# Altium PCB LAN7800-Board.PcbDoc (part 2 of 2)
Units mm, origin at the board's own origin, x right, y up, seen from the top; angles counter-clockwise.
Board outline 69 x 30 mm, 4 copper layers (Top Layer, Layer 1, Layer 2, Bottom Layer), stack 1.587 mm thick; 68 components, 49 nets, 280 pads, 123 vias.
Unrouted connection lines stored in the file: 60.
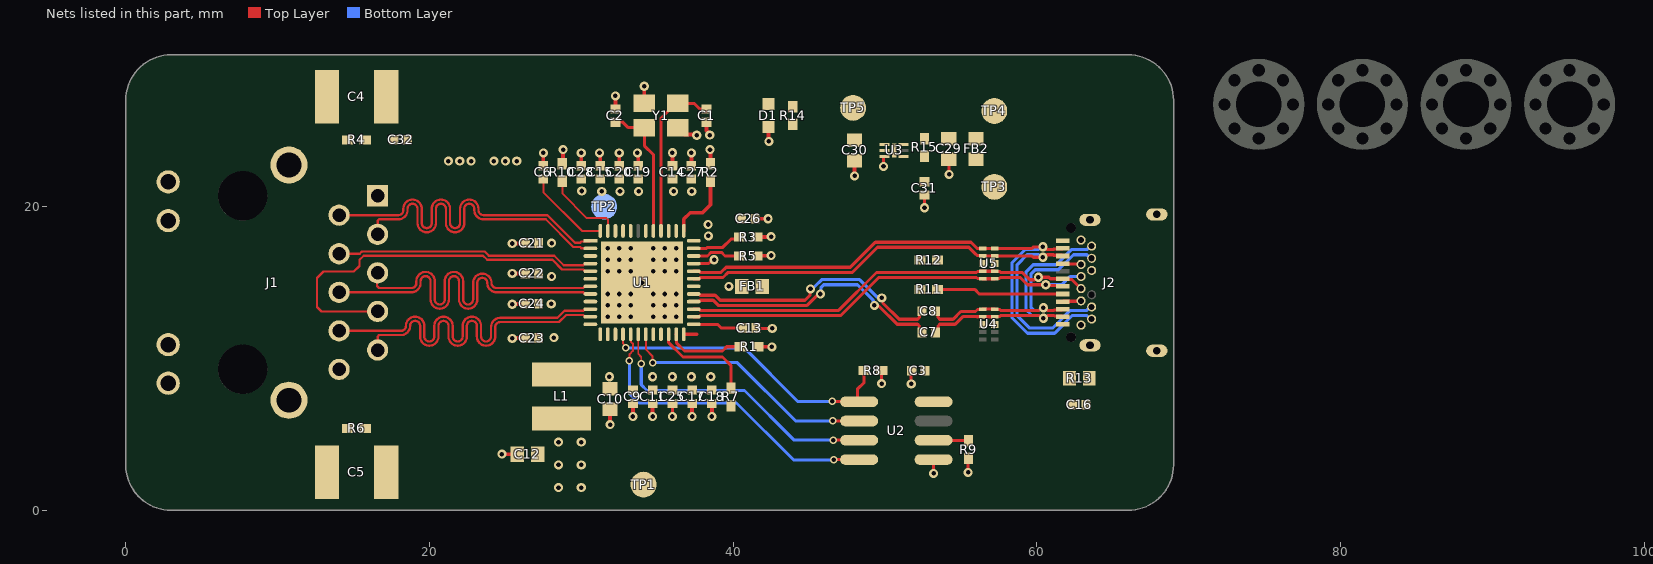
[diagram p4: the nets of this part, all layers, seen from the top]

## Part data (continued)
U3: "Single 500mA LDO w/ Auto Discharge & Internal Enable Pulldown", Dropout Voltage=260mV, manufacturer=Microchip, Max Operating Temperature=125°C, Min Current Limit=525mA, Min Operating Temperature=-40°C, Output Current=500mA, Output Voltage=3.3V, Package Quantity=5000, Supplier Part Number 1=998-MIC5528-3.3YMXTR, Category="Voltage Regulators - Linear", componentlink1description=http://www.microchip.com/mymicrochip/filehandler.aspx?ddocname=en580311&src-supplier=Digi-Key, componentlink1url=http://www.microchip.com/mymicrochip/filehandler.aspx?ddocname=en580311&src-supplier=Digi-Key, Manufacturer Part Number=MIC5528-3.3YMX-TR, Mount="Surface Mount", Number of Regulators=1, packaging="Tape and Reel", Pricing 1="1=0,27000, 10=0,26500, 50=0,23400, 100=0,21200, 1000=0,21200, 10000=0,21200 (USD)", RoHS=Yes, RoHS Compliant=Yes, Stock 1=5009, Supplier 1=Mouser
U4 U5: "Transient Voltage Suppressor, Low Capacitance ESD Protection for High Speed Data, 10-Pin UDFN, Pb-Free, Tape and Reel", manufacturer="On Semiconductor", componentlink1description="Manufacturer URL", componentlink1url=http://www.onsemi.com/, componentlink2description=Datasheet, componentlink2url=http://www.onsemi.cn/pub_link/Collateral/ESD7104-D.PDF, ComponentLink3Description="Package Specification", ComponentLink3URL=http://www.onsemi.com/pub_link/Collateral/517BB.PDF, DatasheetVersion="Rev. 2", Direction=Bidirectional, IR Max (uA)=1, Mounting Technology="Surface Mount", Number of Lines=4, PackageDescription="10-Pin Small Outline No-Lead, Body 2.5 x 1 mm, Pitch 0.5 mm", PackageReference=UDFN-10-517BB-01, PackageVersion="Rev. O, 11/2009", Packing="Tape and Reel", PartNumber=ESD7104MUTAG, RoHS=Pb-Free, V(BR) Min (V)=5.5, VRWM Max (V)=5
Y1: library part "TSX-3225 25.0000MF20X-AJ3", "CRYSTAL 25.0000MHZ 8PF SMD", ESR (Equivalent Series Resistance)="40 Ohms", Frequency Stability=±20ppm, Frequency Tolerance=±10ppm, Load Capacitance=8pF, manufacturer=EPSON, Operating Mode=Fundamental, Operating Temperature="-40°C ~ 85°C", Package / Case="4-SMD, No Lead", Supplier Part Number 1=SER4376CT-ND, componentlink1description=Datasheet, componentlink1url=https://support.epson.biz/td/api/doc_check.php?dl=brief_TSX-3225&lang=en, componentlink2description="DigiKey Link", componentlink2url=https://www.digikey.com/en/products/detail/epson/TSX-3225-25-0000MF20X-AJ3/5260885, Frequency="25 MHz", Height - Seated (Max)="0.024\" (0.60mm)", lastupdated="1/7/2024 9:31:50 PM", Lifecycle Status=Active, Minimum Order=1, Mounting Type="Surface Mount", packaging=TapeAndReel, Part Number="TSX-3225 25.0000MF20X-AJ3", Part Status=Active, partid=431, price=0.44, series=TSX-3225, Size / Dimension="0.126\" L x 0.098\" W (3.20mm x 2.50mm)", Supplier 1=DigiKey, Type="MHz Crystal"

## Free pads (board coordinates)
  round 0.6 hole 0.3 unplated: 2(34,15)

## Via types
v1: diameter 0.6, hole 0.3, Top Layer to Bottom Layer, tented both sides, 114 vias
v2: diameter 0.5, hole 0.3, Top Layer to Bottom Layer, tented both sides, 8 vias
v3: diameter 0.6/0.6 (per signal layer), hole 0.3, Top Layer to Bottom Layer, tented both sides, 1 vias

## Nets (pads, with @x,y where several pads share a name; then routed paths per layer and width w, separated by ;. In a path a pad name is that pad's centre, name@x,y a point inside that pad or via, vN(x,y) a via of type N, cw(c..) or ccw(c..) an arc to the next point about the centre after c; other vN are vias at no path point)
3V3: C3.2 C9.2 C10.2 C14.2 C25.2 C26.2 C27.2 C28.2 C30.2 R1.2 R3.2 R4.2 R6.2 R7.1 R14.2 TP5.1 U1.14 U1.20 U1.36 U1.38 U1.39 U1.46 U2.8 U3.1 U3.2 | length 2.2
  Top Layer w0.254: C10.2@31.925,8.025 C10.2@31.9,8 C10.2@31.985,7.915 ; R3.2@41.575,18 41.587,18.012 42.491,18.012 v1(42.504,18.025) ; R1.2@41.625,10.775 42.546,10.775 v1(42.554,10.767)
  Bottom Layer w0.254: v1@42.362,10.767 v1(42.554,10.767) ; v1@42.475,18.025 v1(42.504,18.025)
  other v1: 31.85,8.8 36,8.8 38.375,18.075 38.35,18.825 36.075,21 37.275,21 30.029,21.032
5V: C29.2 FB2.2 R15.2 TP4.1 U3.6
CHS: C4.2 C5.2 J1.10 J1.S1 J1.S2
CT: C32.2 J1.1
EARTH_GND: C16.1 J2.S R13.1
EEPROM_CLK: U1.19 U2.2 | length 17.3
  Top Layer w0.127: U1.19@34.25,11.599 34.25,10.6 34.685,10.165 34.685,9.74 v2(34.7,9.725)
  Top Layer w0.2: v2(46.55,5.9) 46.558,5.893 48.292,5.893 U2.2@48.3,5.885
  Bottom Layer w0.2: v2(34.7,9.725) 40.275,9.725 44.1,5.9 v2(46.55,5.9)
EEPROM_CS: R8.2 U1.16 U2.1 | length 20.1
  Top Layer w0.127: U1.16@32.75,11.599 32.75,10.976 32.925,10.801 v2(32.925,10.7)
  Top Layer w0.2: v2(46.525,7.175) 46.535,7.165 U2.1@48.29,7.165 ; U2.1@48.3,7.155 U2.1@48.29,7.165 ; R8.2@48.625,9.2 48.625,8.425 48.175,7.975 48.175,7.28 U2.1@48.29,7.165
  Bottom Layer w0.2: v2(32.925,10.7) 40.725,10.7 44.25,7.175 v2(46.525,7.175)
EEPROM_DI: U1.17 U2.4 | length 21
  Top Layer w0.127: v2(33.167,9.849) 33.185,9.867 33.185,10.289 33.4,10.504 33.4,10.975 33.271,11.104 33.271,11.577 U1.17@33.25,11.599
  Top Layer w0.2: v2(46.625,3.325) 46.635,3.335 48.29,3.335 U2.4@48.3,3.345
  Bottom Layer w0.2: v2(33.167,9.849) 33.167,7.708 33.8,7.075 40.225,7.075 43.975,3.325 v2(46.625,3.325)
EEPROM_DO: U1.18 U2.3 | length 19.3
  Top Layer w0.127: U1.18@33.75,11.599 33.75,10.3 33.95,10.1 v2(33.95,9.647)
  Top Layer w0.2: v2(46.6,4.625) 46.605,4.62 48.295,4.62 U2.3@48.3,4.615
  Bottom Layer w0.2: v2(33.95,9.647) 33.95,8.275 34.325,7.9 40.75,7.9 44.025,4.625 v2(46.6,4.625)
GND: C1.1 C2.1 C3.1 C4.1 C5.1 C6.1 C9.1 C10.1 C11.1 C12.1 C13.1 C14.1 C15.1 C16.2 C17.1 C18.1 C19.1 C20.1 C21.1 C22.1 C23.1 C24.1 C25.1 C26.1 C27.1 C28.1 C29.1 C30.1 C31.1 C32.1 D1.2 J2.A1 J2.A12 J2.B1 J2.B12 pad.2 R2.2 R5.2 R8.1 R9.1 R10.1 R11.2 R12.2 R13.2 U1.49 U2.5 U3.3 U3.7 U4.3 U4.8 U5.3 U5.8 Y1.2 Y1.4 | length 33.8
  Top Layer w0.2: v1(36,6.181) C25.1@36,7.035 ; C13.1@41.512,12.007 41.537,11.982 v1(42.572,11.982) ; v1(49.775,8.346) R8.1@49.775,9.2 ; v1(49.9,22.646) 49.9,23.3 U3.3@49.975,23.3 ; v1(51.725,8.326) 51.725,9.165 C3.1@51.76,9.2 ; v1(52.6,19.926) C31.1@52.6,20.76 ; v1(53.2,2.441) U2.5@53.2,3.345 ; C29.1@54.2,23.125 54.2,22.146 v1(54.225,22.121) ; v1(55.475,2.496) 55.475,3.4 R9.1@55.5,3.425
  Top Layer w0.254: v1(24.771,3.7) C12.1@25.775,3.7 ; v1(25.456,11.325) 25.481,11.35 C23.1@26.31,11.35 ; v1(25.456,13.575) 25.481,13.6 C24.1@26.31,13.6 ; v1(25.456,15.6) C22.1@26.31,15.6 ; v1(25.456,17.575) 26.285,17.575 C21.1@26.31,17.6 ; C6.1@27.5,22.69 v1(27.5,23.544) ; R10.1@28.75,22.825 28.8,22.875 v1(28.8,23.754) ; C28.1@30,22.69 v1(30,23.544) ; v1(31.2,23.544) 31.25,23.494 C15.1@31.25,22.69 ; v1(31.9,5.646) C10.1@31.9,6.65 ; C2.1@32.25,26.44 v1(32.25,27.294) ; C20.1@32.5,22.69 v1(32.5,23.544) ; v1(33.4,6.181) C9.1@33.4,7.035 ; v1(33.7,23.544) 33.75,23.494 C19.1@33.75,22.69 ; Y1.4@34.15,26.8 v1(34.15,27.929) ; v1(34.7,6.181) C11.1@34.7,7.035 ; C14.1@36,22.69 v1(36,23.55) ; Y1.2@36.35,25.2 36.798,24.752 37.552,24.752 v1(37.604,24.7) ; C27.1@37.25,22.69 v1(37.25,23.544) ; v1(37.3,6.181) 37.3,6.225 C17.1@37.3,7.035 ; C1.1@38.25,25.56 38.25,25.008 38.458,24.8 v1(38.458,24.706) ; v1(38.475,23.754) 38.5,23.729 R2.2@38.5,22.825 ; v1(38.6,6.181) 38.6,6.325 C18.1@38.6,7.035 ; C26.1@41.44,19.2 v1(42.3,19.2) ; R5.2@41.575,16.75 41.592,16.767 42.488,16.767 v1(42.505,16.784) ; D1.2@42.325,25.25 42.325,24.321 v1(42.35,24.296) ; v1(48,22.021) C30.1@48,23.025
  Bottom Layer w0.2: v1(36,6.181) v1@36,6.35
  Bottom Layer w0.254: v1(24.771,3.7) v1@25,3.7 ; v1(34.7,6.181) v1@34.7,6.3 ; v1@42.275,16.775 42.497,16.775 v1(42.505,16.784)
  other v1: 31.75,12.75 32.5,12.75 33.25,12.75 34.75,12.75 35.5,12.75 36.25,12.75 31.75,13.5 32.5,13.5 33.25,13.5 34.75,13.5 35.5,13.5 36.25,13.5 31.75,14.25 32.5,14.25 33.25,14.25 34.75,14.25 35.5,14.25 36.25,14.25 31.75,15.75 32.5,15.75 33.25,15.75 34.75,15.75 35.5,15.75 36.25,15.75 31.75,16.5 32.5,16.5 33.25,16.5 34.75,16.5 35.5,16.5 36.25,16.5 31.75,17.25 32.5,17.25 33.25,17.25 34.75,17.25 35.5,17.25 36.25,17.25 21.25,23 22,23 22.75,23 24.25,23 25,23 25.75,23
LED2: J1.13 U1.24 | length 0.9
  Top Layer w0.2: U1.24@36.75,11.599 37.624,11.599 37.625,11.6
LED3: J1.12 U1.33 | length 1.5
  Top Layer w0.2: U1.33@37.401,16.25 38.392,16.25 38.642,16.5 v3(38.75,16.5)
NetC6_2: C6.2 U1.48 | length 5.7
  Top Layer w0.13: C6.2@27.5,21.81 27.5,20.95 30.049,18.401 U1.48@31.25,18.401
NetC13_2: C13.2 FB1.1 U1.25 | length 3.3
  Top Layer w0.206: U1.25@37.401,12.25 38.969,12.25 39.212,12.007 C13.2@40.632,12.007
NetC31_2: C31.2 R15.1 U3.4
NetD1_1: D1.1 R14.1
NetJ1_11: J1.11 R4.1
NetJ1_14: J1.14 R6.1
NetJ2_A5: J2.A5 R11.1 | length 8.4
  Top Layer w0.206: R11.1@53.454,14.55 55.9,14.55 56.2,14.25 J2.A5@61.7,14.25
NetJ2_B5: J2.B5 R12.1
NetR9_2: R9.2 U2.6 | length 2.3
  Top Layer w0.2: U2.6@53.2,4.615 55.46,4.615 R9.2@55.5,4.575
NetR10_2: R10.2 U1.47 | length 5.3
  Top Layer w0.13: R10.2@28.75,21.675 28.75,20.875 30.375,19.25 31.65,19.25 31.75,19.15 U1.47@31.75,18.401
nRESET: R3.1 U1.35 | length 3.3
  Top Layer w0.2: U1.35@37.401,17.25 38.252,17.25 38.319,17.317 39.317,17.317 39.867,17.867 40.292,17.867 R3.1@40.425,18
PMEN: R7.2 U1.22 | length 6.8
  Top Layer w0.2: U1.22@35.75,11.599 35.758,11.591 35.758,11.042 36.7,10.1 39.3,10.1 39.85,9.55 R7.2@39.85,8.05
TEST: R5.1 U1.34 | length 3.2
  Top Layer w0.2: U1.34@37.401,16.75 38.307,16.75 38.547,16.99 39.229,16.99 39.469,16.75 R5.1@40.425,16.75
TR0_N: J1.3 U1.2 | length 22.9
  Top Layer w0.15: J1.3@16.59,18.18 16.59,19.076 16.678,19.163 17.742,19.163 17.955,19.163 ccw(c17.955,19.769) 18.561,19.769 18.561,19.859 cw(c18.89,19.859) 18.89,20.187 cw(c18.89,19.859) 19.218,19.859 19.218,18.915 ccw(c19.824,18.915) 19.824,18.31 ccw(c19.824,18.915) 20.429,18.915 20.429,19.859 cw(c20.758,19.859) 20.758,20.187 cw(c20.758,19.859) 21.086,19.859 21.086,18.915 ccw(c21.692,18.915) 21.692,18.31 ccw(c21.692,18.915) 22.297,18.915 22.297,19.859 cw(c22.626,19.859) 22.626,20.187 cw(c22.626,19.859) 22.955,19.859 22.955,19.769 ccw(c23.56,19.769) 23.56,19.163 24.461,19.163 27.662,19.163 29.477,17.348 29.925,17.348 30.006,17.267 30.582,17.267 U1.2@30.599,17.25
TR0_P: J1.2 U1.1 | length 24.5
  Top Layer w0.15: J1.2@14.05,19.44 17.742,19.44 17.955,19.44 ccw(c17.955,19.769) 18.284,19.769 18.284,19.859 cw(c18.89,19.859) 18.89,20.464 cw(c18.89,19.859) 19.495,19.859 19.495,18.915 ccw(c19.824,18.915) 19.824,18.586 ccw(c19.824,18.915) 20.152,18.915 20.152,19.859 cw(c20.758,19.859) 20.758,20.464 cw(c20.758,19.859) 21.363,19.859 21.363,18.915 ccw(c21.692,18.915) 21.692,18.586 ccw(c21.692,18.915) 22.021,18.915 22.021,19.859 cw(c22.626,19.859) 22.626,20.464 cw(c22.626,19.859) 23.231,19.859 23.231,19.769 ccw(c23.56,19.769) 23.56,19.44 24.461,19.44 27.776,19.44 29.591,17.625 29.925,17.625 30.005,17.705 30.554,17.705 U1.1@30.599,17.75
TR1_N: J1.7 U1.5 | length 25.3
  Top Layer w0.15: J1.7@16.59,13.1 12.9,13.1 12.6,13.4 12.6,15.3 13.025,15.725 15.025,15.725 15.4,16.1 15.4,16.498 15.677,16.775 23.525,16.775 23.802,16.498 28.1,16.498 28.737,15.862 30.128,15.862 30.239,15.75 U1.5@30.599,15.75
TR1_P: J1.4 U1.4 | length 17
  Top Layer w0.15: J1.4@14.05,16.9 15.411,16.9 15.563,17.052 17.301,17.052 23.64,17.052 23.916,16.775 24.901,16.775 28.215,16.775 28.852,16.138 30.128,16.138 30.239,16.25 U1.4@30.599,16.25
TR2_N: J1.6 U1.8 | length 24.7
  Top Layer w0.15: J1.6@14.05,14.36 18.6,14.36 18.716,14.36 18.813,14.361 ccw(c18.813,14.966) 19.418,14.966 19.418,15.097 cw(c19.747,15.097) 19.747,15.426 cw(c19.747,15.097) 20.076,15.097 20.076,13.889 ccw(c20.681,13.889) 20.681,13.284 ccw(c20.681,13.889) 21.287,13.889 21.287,15.097 cw(c21.615,15.097) 21.615,15.426 cw(c21.615,15.097) 21.944,15.097 21.944,13.889 ccw(c22.549,13.889) 22.549,13.284 ccw(c22.549,13.889) 23.155,13.889 23.155,14.983 cw(c23.484,14.983) 23.484,15.312 cw(c23.484,14.983) 23.812,14.983 23.812,14.966 ccw(c24.418,14.966) 24.418,14.361 26.975,14.361 ; 26.977,14.362 30.128,14.362 30.239,14.25 U1.8@30.599,14.25
TR2_P: J1.5 U1.7 | length 23.1
  Top Layer w0.15: J1.5@16.59,15.64 16.55,15.6 16.55,14.775 16.688,14.637 18.6,14.637 ; 18.602,14.637 18.813,14.637 ccw(c18.813,14.966) 19.142,14.966 19.142,15.097 cw(c19.747,15.097) 19.747,15.702 cw(c19.747,15.097) 20.352,15.097 20.352,13.889 ccw(c20.681,13.889) 20.681,13.56 ccw(c20.681,13.889) 21.01,13.889 21.01,15.097 cw(c21.615,15.097) 21.615,15.702 cw(c21.615,15.097) 22.221,15.097 22.221,13.889 ccw(c22.549,13.889) 22.549,13.56 ccw(c22.549,13.889) 22.878,13.889 22.878,14.983 cw(c23.484,14.983) 23.484,15.588 cw(c23.484,14.983) 24.089,14.983 24.089,14.966 ccw(c24.418,14.966) 24.418,14.637 26.86,14.637 ; 26.861,14.638 26.977,14.638 30.128,14.638 30.239,14.75 U1.7@30.599,14.75
TR3_N: J1.9 U1.11 | length 23
  Top Layer w0.15: J1.9@16.59,10.56 16.59,11.456 16.678,11.543 17.912,11.543 18.125,11.543 ccw(c18.125,12.149) 18.73,12.149 18.73,12.151 cw(c19.059,12.151) 19.059,12.48 cw(c19.059,12.151) 19.388,12.151 19.388,11.452 ccw(c19.993,11.452) 19.993,10.847 ccw(c19.993,11.452) 20.599,11.452 20.599,12.151 cw(c20.927,12.151) 20.927,12.48 cw(c20.927,12.151) 21.256,12.151 21.256,11.452 ccw(c21.861,11.452) 21.861,10.847 ccw(c21.861,11.452) 22.467,11.452 22.467,12.151 cw(c22.796,12.151) 22.796,12.48 cw(c22.796,12.151) 23.124,12.151 23.124,11.452 ccw(c23.73,11.452) 23.73,10.847 ccw(c23.73,11.452) 24.335,11.452 24.335,12.071 cw(c24.664,12.071) 24.664,12.4 26.241,12.4 28.541,12.4 29.003,12.862 30.128,12.862 30.239,12.75 U1.11@30.599,12.75
TR3_P: J1.8 U1.10 | length 24.6
  Top Layer w0.15: J1.8@14.05,11.82 17.912,11.82 18.125,11.82 ccw(c18.125,12.149) 18.454,12.149 18.454,12.151 cw(c19.059,12.151) 19.059,12.756 cw(c19.059,12.151) 19.664,12.151 19.664,11.452 ccw(c19.993,11.452) 19.993,11.123 ccw(c19.993,11.452) 20.322,11.452 20.322,12.151 cw(c20.927,12.151) 20.927,12.756 cw(c20.927,12.151) 21.533,12.151 21.533,11.452 ccw(c21.861,11.452) 21.861,11.123 ccw(c21.861,11.452) 22.19,11.452 22.19,12.151 cw(c22.796,12.151) 22.796,12.756 cw(c22.796,12.151) 23.401,12.151 23.401,11.452 ccw(c23.73,11.452) 23.73,11.123 ccw(c23.73,11.452) 24.058,11.452 24.058,12.071 cw(c24.664,12.071) 24.664,12.677 26.241,12.677 28.427,12.677 28.888,13.138 30.128,13.138 30.239,13.25 U1.10@30.599,13.25
USB_RX_N: J2.A11 J2.B11 U1.32 U5.5 U5.6 | length 37.8
  Top Layer w0.206: U1.32@37.401,15.75 37.745,15.75 37.829,15.667 39.195,15.667 39.537,16.008 47.718,16.008 49.368,17.658 55.661,17.658 56.077,17.242 56.417,17.242 U5.6@56.425,17.25 U5.5@57.225,17.25 59.688,17.25 59.791,17.353 v1@60.394,17.353 ; v1@60.4,17.345 60.507,17.345 60.685,17.167 61.079,17.167 61.116,17.203 61.653,17.203 J2.A11@61.7,17.25
  Bottom Layer w0.206: v1(60.4,17.359) 60.293,17.359 60.115,17.181 59.231,17.181 58.367,16.317 58.367,12.687 59.387,11.667 61.167,11.667 62.333,12.833 63.292,12.833 63.526,12.6 J2.B11@63.61,12.6
USB_RX_P: J2.A10 J2.B10 U1.31 U5.4 U5.7 | length 36.4
  Top Layer w0.206: U1.31@37.401,15.25 37.745,15.25 37.829,15.333 39.333,15.333 39.675,15.675 47.856,15.675 49.506,17.325 55.523,17.325 55.939,16.909 55.954,16.909 56.091,16.772 56.403,16.772 U5.7@56.425,16.75 U5.4@57.225,16.75 59.688,16.75 59.769,16.669 v1(60.4,16.669) ; 60.685,16.833 61.079,16.833 61.116,16.797 61.653,16.797 J2.A10@61.7,16.75
  Bottom Layer w0.206: v1(60.4,16.669) 60.293,16.669 60.115,16.848 59.369,16.848 58.7,16.179 58.7,12.825 59.525,12 61.029,12 62.195,13.167 63.292,13.167 63.526,13.4 J2.B10@63.61,13.4
USB_TX_N: C8.2 J2.A3 J2.B3 U4.5 U4.6 | length 16.3
  Top Layer w0.206: C8.2@53.319,13.121 53.489,12.951 53.489,12.706 53.609,12.585 54.484,12.585 54.993,13.095 55.958,13.095 56.091,13.228 56.403,13.228 U4.6@56.425,13.25 U4.5@57.225,13.25 57.247,13.228 57.559,13.228 57.621,13.167 60.14,13.167 ; 60.71,13.167 61.125,13.167 61.162,13.203 61.653,13.203 J2.A3@61.7,13.25
  Bottom Layer w0.206: v1(60.425,13.345) 60.318,13.345 60.14,13.167 59.816,13.167 59.607,13.375 59.607,15.554 59.896,15.843 61.418,15.843 62.408,16.833 63.292,16.833 63.526,16.6 J2.B3@63.61,16.6
USB_TX_P: C7.2 J2.A2 J2.B2 U4.4 U4.7 | length 17.4
  Top Layer w0.206: C7.2@53.319,11.716 53.489,11.886 53.489,12.131 53.609,12.252 54.622,12.252 55.131,12.762 56.045,12.762 56.071,12.736 56.127,12.736 ; 56.127,12.772 56.403,12.772 U4.7@56.425,12.75 U4.4@57.225,12.75 57.247,12.772 57.559,12.772 57.621,12.833 60.14,12.833 ; 60.71,12.833 61.125,12.833 61.161,12.797 61.653,12.797 J2.A2@61.7,12.75
  Bottom Layer w0.206: v1(60.425,12.655) 60.318,12.655 60.14,12.833 59.678,12.833 59.274,13.237 59.274,15.692 59.758,16.176 61.28,16.176 62.27,17.167 63.292,17.167 63.526,17.4 J2.B2@63.61,17.4
USBC_D_N: J2.A7 J2.B7 U1.27 U5.2 U5.9 | length 27.2
  Top Layer w0.206: U1.27@37.401,13.25 37.745,13.25 37.829,13.167 46.945,13.167 49.445,15.667 56.029,15.667 56.091,15.728 56.278,15.728 56.3,15.75 U5.2@57.225,15.75 57.247,15.728 57.559,15.728 57.621,15.667 59.049,15.667 59.526,15.19 59.833,15.19 59.993,15.35 v1(60.1,15.35) 60.792,15.35 60.892,15.25 J2.A7@61.7,15.25 61.747,15.203 62.307,15.203 J2.B7@62.91,14.6
USBC_D_P: J2.A6 J2.B6 U1.26 U5.1 U5.10 | length 28.3
  Top Layer w0.206: U1.26@37.401,12.75 37.745,12.75 37.829,12.833 47.083,12.833 49.583,15.333 56.029,15.333 56.091,15.272 56.403,15.272 U5.10@56.425,15.25 U5.1@57.225,15.25 57.247,15.272 57.537,15.272 57.599,15.333 58.911,15.333 59.388,14.857 v1(60.588,14.857) 60.648,14.797 61.653,14.797 J2.A6@61.7,14.75 ; J2.B6@62.853,15.4 J2.B6@62.91,15.4
  Bottom Layer w0.206: v1(60.588,14.857) 61.632,14.857 62.175,15.4 J2.B6@62.91,15.4
USBC_TX_N: C8.1 U1.29 | length 17.2
  Top Layer w0.206: U1.29@37.401,14.25 37.745,14.25 37.829,14.167 38.818,14.167 39.151,13.833 44.734,13.833 45.065,14.164 45.065,14.554 v1(45.094,14.583) ; 49.863,13.66 50.938,12.585 52.149,12.585 52.269,12.706 52.269,12.951 C8.1@52.439,13.121
  Bottom Layer w0.206: v1(45.094,14.583) 45.201,14.583 45.362,14.744 45.383,14.744 45.831,15.192 48.331,15.192 49.46,14.063 49.713,14.063 v1(49.788,13.988)
USBC_TX_P: C7.1 U1.28 | length 17.2
  Top Layer w0.206: U1.28@37.401,13.75 37.745,13.75 37.829,13.833 38.68,13.833 39.013,13.5 44.872,13.5 45.462,14.089 45.483,14.089 45.643,14.25 v1(45.75,14.25) ; 49.628,13.425 50.8,12.252 52.149,12.252 52.269,12.131 52.269,11.886 C7.1@52.439,11.716
  Bottom Layer w0.206: v1(45.75,14.25) 45.779,14.279 45.779,14.67 45.969,14.859 48.193,14.859 49.225,13.828 49.225,13.575 v1(49.3,13.5)
USBRBIAS: R2.1 U1.37 | length 4.5
  Top Layer w0.254: U1.37@36.75,18.401 36.75,19.175 37.175,19.6 37.975,19.6 38.5,20.125 R2.1@38.5,21.675
VBUS: FB2.1 J2.A4 J2.A9 J2.B4 J2.B9 TP3.1 | length 2.5
  Top Layer w0.206: J2.A4@61.7,13.75 61.725,13.775 62.885,13.775 J2.B9@62.91,13.8 ; J2.A9@61.7,16.25 61.725,16.225 62.885,16.225 J2.B4@62.91,16.2
VBUS_DET: R1.1 U1.23 | length 5.1
  Top Layer w0.2: U1.23@36.25,11.599 36.258,11.591 36.258,11.042 36.8,10.5 39.3,10.5 39.575,10.775 R1.1@40.475,10.775
VDD12: C11.2 C12.2 C17.2 C18.2 C19.2 C20.2 FB1.2 L1.2 TP1.1 U1.15 U1.21 U1.30 U1.42 U1.44
  other v1: 28.5,1.5 30,1.5 28.5,3 30,3 28.5,4.5 30,4.5 34.7,8.8 37.25,8.8 38.525,8.8 39.725,14.75 32.55,21 33.775,21
VDD12_SW_OUT: L1.1 U1.13
VDD25: C15.2 C21.2 C22.2 C23.2 C24.2 TP2.1 U1.3 U1.6 U1.9 U1.12 U1.45
  other v1: 28.2,11.375 28.025,13.6 28.05,15.4 28.05,17.6 31.35,21
XI: C1.2 U1.40 Y1.3 | length 11
  Top Layer w0.2: U1.40@35.25,18.401 35.25,25.025 35.25,25.825 36.225,26.8 Y1.3@36.35,26.8 37.425,26.8 37.785,26.44 C1.2@38.25,26.44
XO: C2.2 U1.41 Y1.1 | length 9.1
  Top Layer w0.2: C2.2@32.25,25.56 32.74,25.56 33.1,25.2 Y1.1@34.15,25.2 34.15,24.019 34.75,23.419 U1.41@34.75,18.401
pads on no net: J1. J2. J2.A8 J2.B8 MH1.1 MH2.1 MH3.1 MH4.1 U1.43 U2.7 U3.5 U4.1 U4.2 U4.9 U4.10

## Polygon pours and split planes (outlines as drawn)
VDD12 on Top Layer "VDD12_L01_P020" (solid, pour order 20): 36.95,14.975 36.95,14.525 39.45,14.525 40,13.975 41.25,13.975 41.25,15.525 40,15.525 39.45,14.975
VDD12 on Top Layer "VDD12_L01_P019" (solid, pour order 19): 35,12.05 35,11 36.65,9.35 36.65,7.5 39.1,7.5 39.1,9.325 38.575,9.85 36.625,9.85 35.5,10.975 35.5,12.05
3V3 on Top Layer "3V3_L01_P013" (solid, pour order 13): 30.55,22.15 29.5,22.15 29.5,20.675 30.7,19.475 31.925,19.475 32.025,19.375 32.025,17.95 32.425,17.95 32.475,18 32.475,19.4 32.475,19.65 32.222,19.903 31.483,19.903 30.545,20.842 30.55,20.847
VDD12 on Top Layer "VDD12_L01_P010" (solid, pour order 10): 32.008,22.15 34.1,22.15 34.475,21.775 34.475,17.95 33.1,17.95 33.1,20.309 32.836,20.573 32.378,20.573 32.008,20.943
VDD25 on Top Layer "VDD25_L01_P018" (solid, pour order 18): 26.775,18.075 28.175,18.075 29.325,16.925 31.05,16.925 31.05,16.575 28.65,16.575 28.075,17.15 26.775,17.15
VDD25 on Top Layer "VDD25_L01_P017" (solid, pour order 17): 31.025,12.5 29.025,12.5 28.45,11.925 26.8,11.925 26.8,10.8 30.375,10.8 31.025,11.45
VDD25 on Top Layer "VDD25_L01_P016" (solid, pour order 16): 31.05,14 30.1,14 29.95,14.15 26.825,14.15 26.825,13.025 28.4,13.025 28.725,13.35 30,13.35 30.175,13.525 31.05,13.525
VDD25 on Top Layer "VDD25_L01_P015" (solid, pour order 15): 31.05,15.55 28.5,15.55 27.875,16.175 26.75,16.175 26.75,14.95 28.675,14.95 31.05,14.95
3V3 on Top Layer "3V3_L01_P012" (solid, pour order 12): 34.625,10.7 35.575,9.75 35.575,7.5 36.425,7.5 36.4,7.525 36.4,9.3 34.87,10.83 34.87,12.054 34.625,12.054
VDD12 on Top Layer "VDD12_L01_P008" (solid, pour order 8): 32.131,12.066 32.131,9.459 32.907,8.682 33.969,8.682 33.969,7.475 35.2,7.475 35.2,9.125 32.95,9.125 32.373,9.702 32.373,12.065 32.132,12.065 32.131,12.066
VDD25 on Top Layer "VDD25_L01_P011" (solid, pour order 11): 32.875,20.325 32.775,20.425 32.3,20.425 31.9,20.825 31.9,22.15 30.75,22.15 30.75,20.825 31.525,20.05 32.35,20.05 32.625,19.775 32.625,17.95 32.875,17.95
3V3 on Top Layer "3V3_L01_P007" (solid, pour order 7): 31.571,12.075 31.571,9.096 31.225,8.75 31.225,7.475 33.825,7.475 33.825,8.55 32.807,8.55 31.95,9.407 31.95,12.075
VDD12 on Top Layer "VDD12_L01_P009" (solid, pour order 9): 26.55,0.75 31.1,0.75 31.1,7.125 30.775,7.45 26.95,7.45 26.55,7.05
VDD12_SW_OUT on Top Layer "VDD12_SW_OUT_L01_P006" (solid, pour order 6): 31.05,12.075 31.05,10.475 30.675,10.1 26.8,10.1 26.575,9.875 26.575,8 31.05,8 31.05,8.85 31.425,9.225 31.425,12.075
3V3 on Top Layer "3V3_L01_P003" (solid, pour order 3): 36.475,17.95 36.475,19.225 37.075,19.825 37.85,19.825 37.85,22.25 35.5,22.25 35.5,17.95
3V3 on Top Layer "3V3_L01_P002" (solid, pour order 2): 36.95,17.525 38.475,17.525 39.575,18.625 41,18.625 41,19.775 38.5,19.775 38.075,19.35 37.3,19.35 36.95,19
CHS on Layer 1 (split plane): 3,29.49 15.071,29.49 15.071,21.129 12.5,21.129 12.45,21.12 12.408,21.092 12.38,21.05 12.371,21 12.371,10.6 12.38,10.55 12.408,10.508 12.45,10.48 12.5,10.471 15.071,10.471 15.071,0.51 3,0.51 2.984,0.509 2.783,0.518 2.567,0.546 2.355,0.593 2.148,0.658 1.947,0.742 1.754,0.842 1.571,0.959 1.398,1.091 1.238,1.238 1.091,1.398 0.959,1.571 0.842,1.754 0.742,1.947 0.658,2.148 0.593,2.355 0.546,2.567 0.518,2.783 0.509,2.984 0.51,3 0.51,27 0.509,27.016 0.518,27.217 0.546,27.433 0.593,27.645 0.658,27.852 0.742,28.053 0.842,28.246 0.959,28.429 1.091,28.602 1.238,28.762 1.398,28.909 1.571,29.041 1.754,29.158 1.947,29.258 2.148,29.342 2.355,29.407 2.567,29.454 2.783,29.482 2.984,29.491
GND on Layer 1 (split plane): 66.217,29.482 66.433,29.454 66.645,29.407 66.852,29.342 67.053,29.258 67.246,29.158 67.429,29.041 67.602,28.909 67.762,28.762 67.909,28.602 68.041,28.429 68.158,28.246 68.258,28.053 68.342,27.852 68.407,27.645 68.454,27.433 68.482,27.217 68.491,27.016 68.49,27 68.49,3 68.491,2.984 68.482,2.783 68.454,2.567 68.407,2.355 68.342,2.148 68.258,1.947 68.158,1.754 68.041,1.571 67.909,1.398 67.762,1.238 67.602,1.091 67.429,0.959 67.246,0.842 67.053,0.742 66.852,0.658 66.645,0.593 66.433,0.546 66.217,0.518 66.016,0.509 66,0.51 15.329,0.51 15.329,10.6 15.32,10.65 15.292,10.692 15.25,10.72 15.2,10.729 12.629,10.729 12.629,20.871 15.2,20.871 15.25,20.88 15.292,20.908 15.32,20.95 15.329,21 15.329,29.49 66,29.49 66.016,29.491
VDD12 on Layer 2 (split plane): 45.571,14.329 41.1,14.329 41.05,14.32 41.008,14.292 40.98,14.25 40.971,14.2 40.971,0.929 26.829,0.929 26.829,4.971 34,4.971 34.05,4.98 34.092,5.008 34.12,5.05 34.129,5.1 34.129,9.571 35.271,9.571 35.271,5.1 35.28,5.05 35.308,5.008 35.35,4.98 35.4,4.971 36.6,4.971 36.65,4.98 36.692,5.008 36.72,5.05 36.729,5.1 36.729,9.571 39.2,9.571 39.25,9.58 39.292,9.608 39.32,9.65 39.329,9.7 39.329,16.171 43.5,16.171 43.55,16.18 43.592,16.208 43.62,16.25 43.629,16.3 43.629,22.2 43.62,22.25 43.592,22.292 43.55,22.32 43.5,22.329 34.8,22.329 34.75,22.32 34.708,22.292 34.68,22.25 34.671,22.2 34.671,20.129 32.029,20.129 32.029,24.171 45.571,24.171
GND on Layer 2 (split plane): 66.217,29.482 66.433,29.454 66.645,29.407 66.852,29.342 67.053,29.258 67.246,29.158 67.429,29.041 67.602,28.909 67.762,28.762 67.909,28.602 68.041,28.429 68.158,28.246 68.258,28.053 68.342,27.852 68.407,27.645 68.454,27.433 68.482,27.217 68.491,27.016 68.49,27 68.49,3 68.491,2.984 68.482,2.783 68.454,2.567 68.407,2.355 68.342,2.148 68.258,1.947 68.158,1.754 68.041,1.571 67.909,1.398 67.762,1.238 67.602,1.091 67.429,0.959 67.246,0.842 67.053,0.742 66.852,0.658 66.645,0.593 66.433,0.546 66.217,0.518 66.016,0.509 66,0.51 15.329,0.51 15.329,10.6 15.32,10.65 15.292,10.692 15.25,10.72 15.2,10.729 12.629,10.729 12.629,20.871 15.2,20.871 15.25,20.88 15.292,20.908 15.32,20.95 15.329,21 15.329,29.49 66,29.49 66.016,29.491
CHS on Layer 2 (split plane): 3,29.49 15.071,29.49 15.071,21.129 12.5,21.129 12.45,21.12 12.408,21.092 12.38,21.05 12.371,21 12.371,10.6 12.38,10.55 12.408,10.508 12.45,10.48 12.5,10.471 15.071,10.471 15.071,0.51 3,0.51 2.984,0.509 2.783,0.518 2.567,0.546 2.355,0.593 2.148,0.658 1.947,0.742 1.754,0.842 1.571,0.959 1.398,1.091 1.238,1.238 1.091,1.398 0.959,1.571 0.842,1.754 0.742,1.947 0.658,2.148 0.593,2.355 0.546,2.567 0.518,2.783 0.509,2.984 0.51,3 0.51,27 0.509,27.016 0.518,27.217 0.546,27.433 0.593,27.645 0.658,27.852 0.742,28.053 0.842,28.246 0.959,28.429 1.091,28.602 1.238,28.762 1.398,28.909 1.571,29.041 1.754,29.158 1.947,29.258 2.148,29.342 2.355,29.407 2.567,29.454 2.783,29.482 2.984,29.491

## Other copper
Layer 1 (plane layer: these items are gaps in the copper):
  lines w0.254: 15.2,0 15.2,10.6 12.5,10.6 12.5,21 15.2,21 15.2,30
Layer 2 (plane layer: these items are gaps in the copper):
  lines w0.254: 15.2,0 15.2,10.6 12.5,10.6 12.5,21 15.2,21 15.2,30 ; 26.7,0.8 26.7,5.1 28.1,5.1 34,5.1 34,9.7 35.4,9.7 35.4,5.1 36.6,5.1 36.6,9.7 37.3,9.7 39.2,9.7 39.2,16.3 43.5,16.3 43.5,22.2 34.8,22.2 34.8,20 31.9,20 31.9,24.3 45.7,24.3 45.7,14.2 41.1,14.2 41.1,0.8 39.8,0.8 26.7,0.8

## Silkscreen, mask and mechanical layers (free items; w line width, h text height)
Top Overlay:
  lines w0.254: 28.2,19.1 29.9,19.1 30.5,18.5
Board Cutout:
  the board outline again, w0.254